# EAGLE board hbs_pcb (EAGLE 9.3.2)
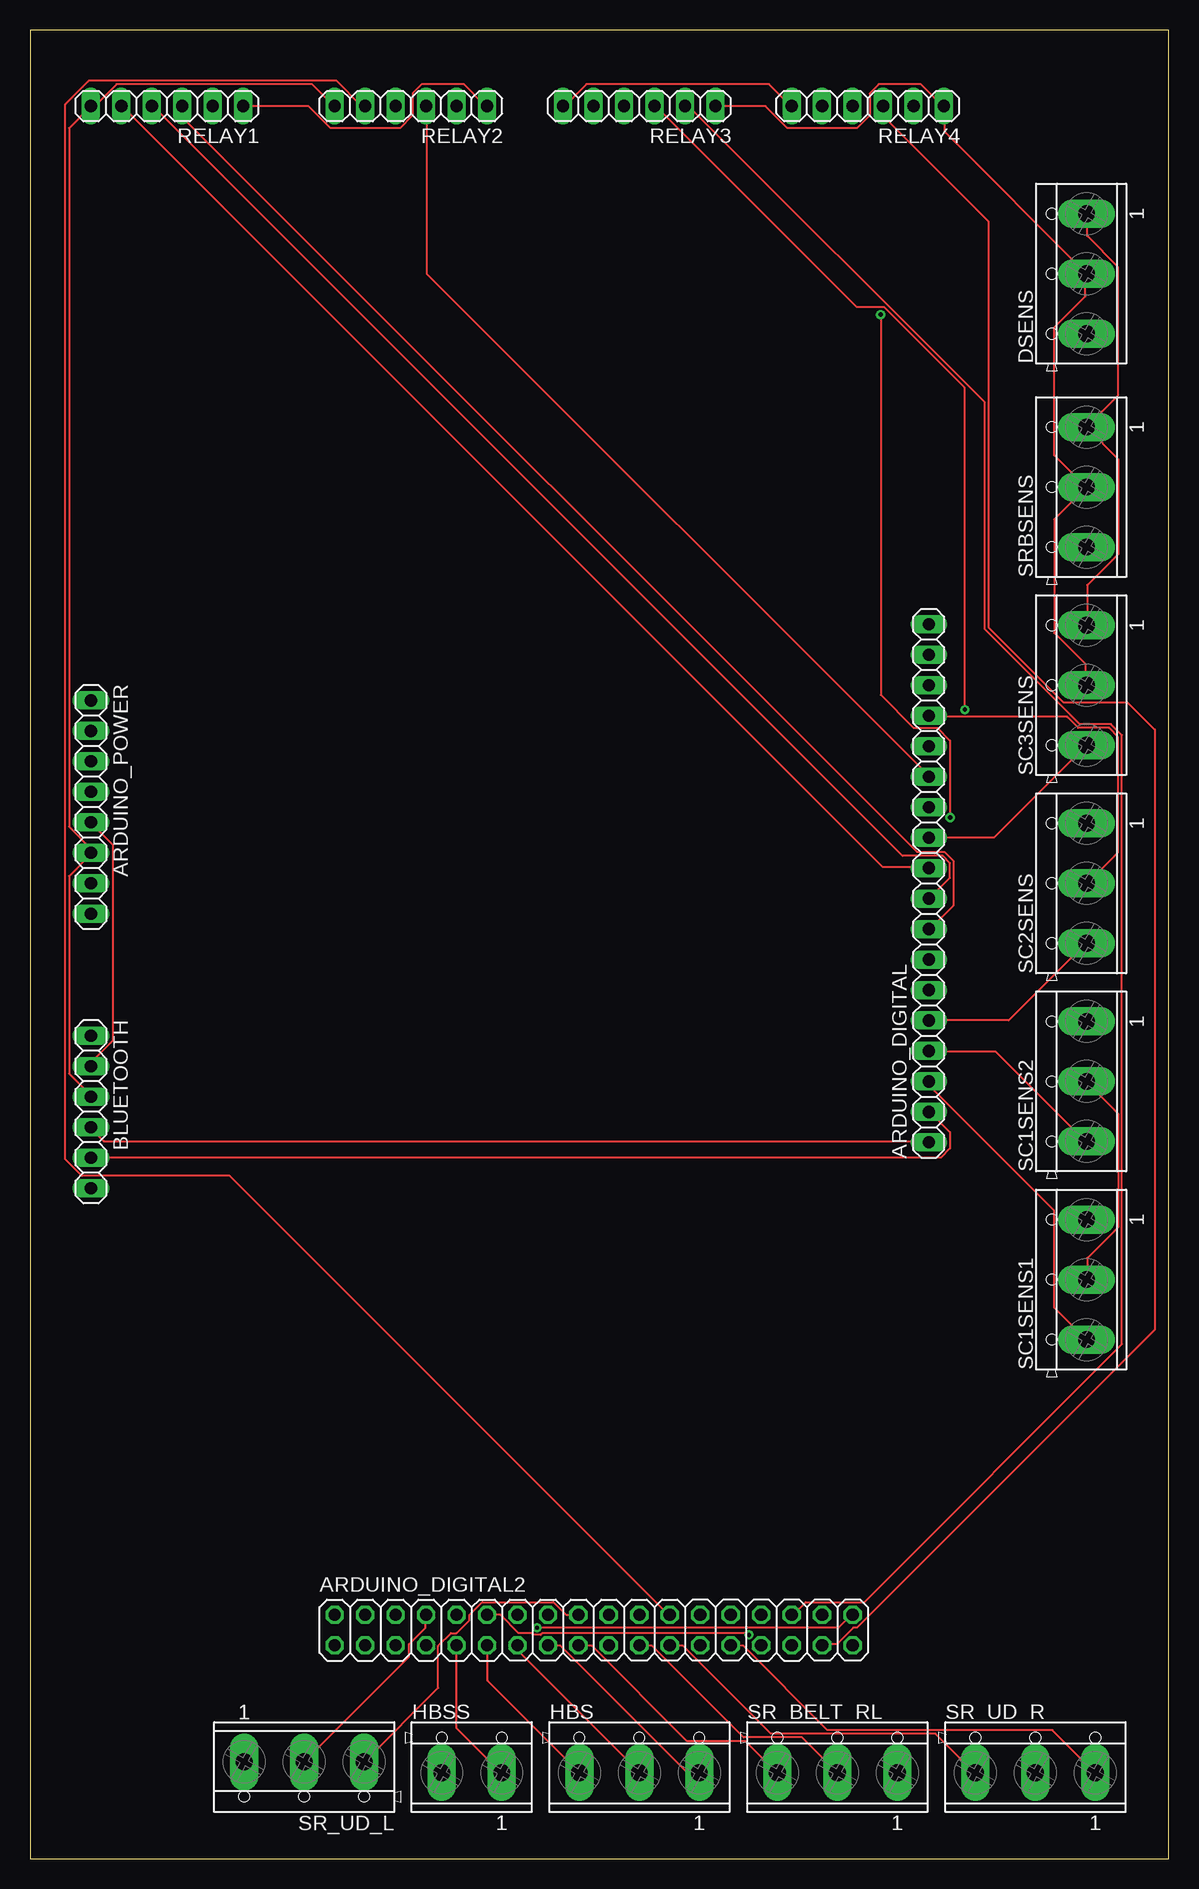
[diagram p0: board, top side]
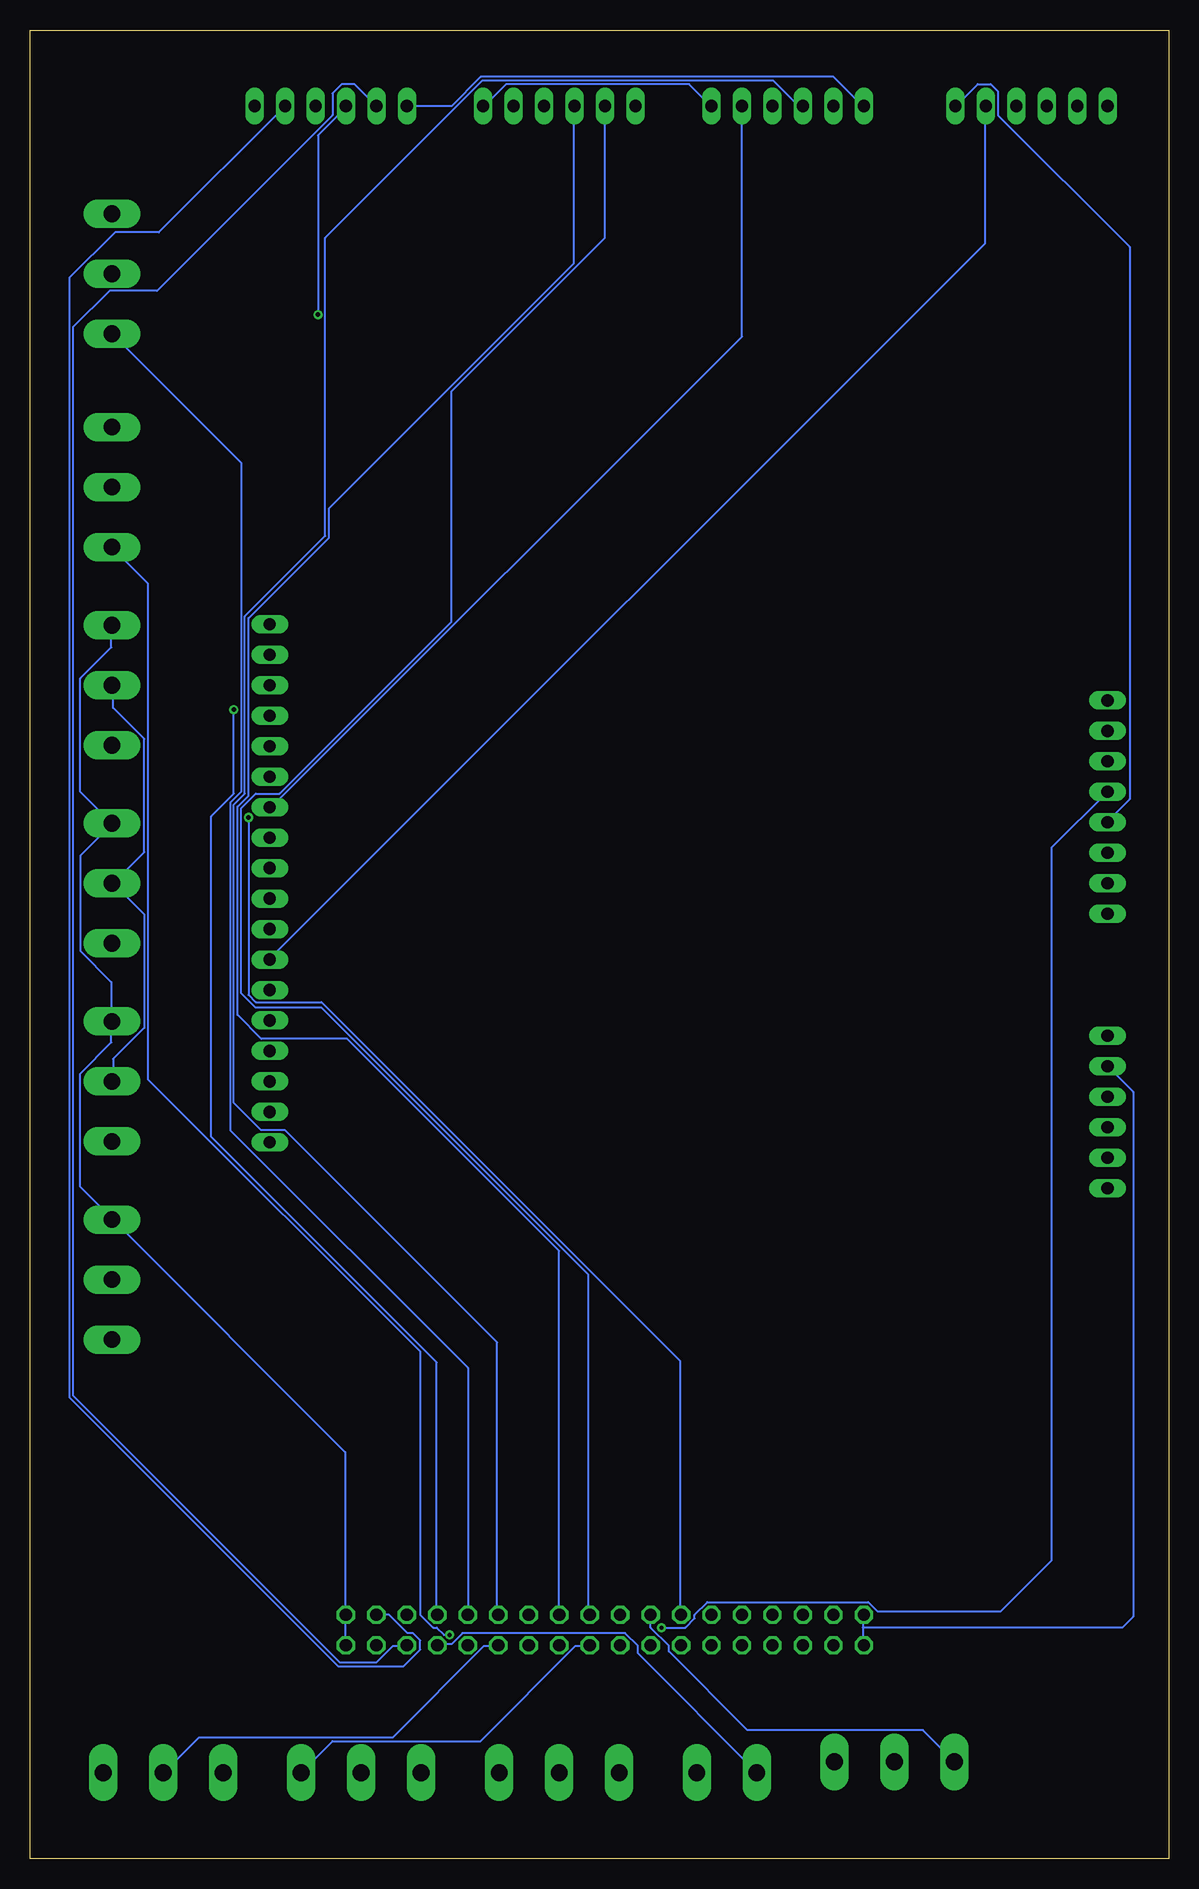
[diagram p1: board, bottom side, seen from below]

Size 94.92 x 152.39 mm. Coordinates in mm from the lower left corner, seen from the top.
Outline: 0,0 94.92,0 94.92,152.39 0,152.39 0,0
Copper layers (1*16): Top 0.035mm / dielectric 1.5mm / Bottom 0.035mm
Design rules "default": minimum track width 6mil, minimum drill 0.35mm, track to track 6mil, track to pad 6mil, pad to pad 6mil, via to via 6mil, smd to smd 6mil, copper to edge 40mil, drill to drill 6mil, minimum pad ring 10mil, minimum via ring 8mil, stop-mask expansion 4mil, vias tented up to drill 0mil, thermal gap 10mil

## Footprints (pad centres in the part's own frame; a part is rotated, then mirrored left to right if it is on the bottom)
1X18 = drill 1.016 long: 1 -21.59,0; 2 -19.05,0; 3 -16.51,0; 4 -13.97,0; 5 -11.43,0; 6 -8.89,0; 7 -6.35,0; 8 -3.81,0; 9 -1.27,0; 10 1.27,0; 11 3.81,0; 12 6.35,0; 13 8.89,0; 14 11.43,0; 15 13.97,0; 16 16.51,0; 17 19.05,0; 18 21.59,0
2X18 = drill 1.016 octagon: 1 -21.59,-1.27; 2 -21.59,1.27; 3 -19.05,-1.27; 4 -19.05,1.27; 5 -16.51,-1.27; 6 -16.51,1.27; 7 -13.97,-1.27; 8 -13.97,1.27; 9 -11.43,-1.27; 10 -11.43,1.27; 11 -8.89,-1.27; 12 -8.89,1.27; 13 -6.35,-1.27; 14 -6.35,1.27; 15 -3.81,-1.27; 16 -3.81,1.27; 17 -1.27,-1.27; 18 -1.27,1.27; 19 1.27,-1.27; 20 1.27,1.27; 21 3.81,-1.27; 22 3.81,1.27; 23 6.35,-1.27; 24 6.35,1.27; 25 8.89,-1.27; 26 8.89,1.27; 27 11.43,-1.27; 28 11.43,1.27; 29 13.97,-1.27; 30 13.97,1.27; 31 16.51,-1.27; 32 16.51,1.27; 33 19.05,-1.27; 34 19.05,1.27; 35 21.59,-1.27; 36 21.59,1.27
1X08 = drill 1.016 long: 1 -8.89,0; 2 -6.35,0; 3 -3.81,0; 4 -1.27,0; 5 1.27,0; 6 3.81,0; 7 6.35,0; 8 8.89,0
1X06 = drill 1.016 long: 1 -6.35,0; 2 -3.81,0; 3 -1.27,0; 4 1.27,0; 5 3.81,0; 6 6.35,0
TERMINAL_BLOCK_3P_5 = drill 1.4 pad 2.38 long: 1 5,-0.45; 2 0,-0.45; 3 -5,-0.45
TERMINAL_BLOCK_2P_5 = drill 1.4 pad 2.38 long: 1 2.5,-0.45; 2 -2.5,-0.45

## Placement (x,y rotation side)
ARDUINO_DIGITAL  [1X18]  74.93,81.28 90 top
ARDUINO_DIGITAL2  [2X18]  46.99,19.05 0 top
ARDUINO_POWER  [1X08]  5.08,87.63 270 top
BLUETOOTH  [1X06]  5.08,62.23 270 top
DSENS  CON_TERMINAL_BLOCK_03-5MM  [TERMINAL_BLOCK_3P_5]  87.63,132.08 90 top
HBS  CON_TERMINAL_BLOCK_03-5MM  [TERMINAL_BLOCK_3P_5]  50.8,7.62 0 top
HBSS  CON_TERMINAL_BLOCK_02-5MM  [TERMINAL_BLOCK_2P_5]  36.83,7.62 0 top
RELAY1  [1X06]  11.43,146.05 180 top
RELAY2  [1X06]  31.75,146.05 180 top
RELAY3  [1X06]  50.8,146.05 180 top
RELAY4  [1X06]  69.85,146.05 180 top
SC1SENS1  CON_TERMINAL_BLOCK_03-5MM  [TERMINAL_BLOCK_3P_5]  87.63,48.26 90 top
SC1SENS2  CON_TERMINAL_BLOCK_03-5MM  [TERMINAL_BLOCK_3P_5]  87.63,64.77 90 top
SC2SENS  CON_TERMINAL_BLOCK_03-5MM  [TERMINAL_BLOCK_3P_5]  87.63,81.28 90 top
SC3SENS  CON_TERMINAL_BLOCK_03-5MM  [TERMINAL_BLOCK_3P_5]  87.63,97.79 90 top
SR_BELT_RL  CON_TERMINAL_BLOCK_03-5MM  [TERMINAL_BLOCK_3P_5]  67.31,7.62 0 top
SR_UD_L  CON_TERMINAL_BLOCK_03-5MM  [TERMINAL_BLOCK_3P_5]  22.86,7.62 180 top
SR_UD_R  CON_TERMINAL_BLOCK_03-5MM  [TERMINAL_BLOCK_3P_5]  83.82,7.62 0 top
SRBSENS  CON_TERMINAL_BLOCK_03-5MM  [TERMINAL_BLOCK_3P_5]  87.63,114.3 90 top

## Library data of the parts
ARDUINO_DIGITAL ARDUINO_DIGITAL2 ARDUINO_POWER BLUETOOTH RELAY1-RELAY4 = pinhead
DSENS HBS HBSS SC1SENS1 SC1SENS2 SC2SENS SC3SENS SR_BELT_RL SR_UD_L SR_UD_R SRBSENS = dp_devices.v6

## Nets
N$1: ARDUINO_DIGITAL.1 BLUETOOTH.4
N$2: ARDUINO_DIGITAL.2 BLUETOOTH.5
N$3: ARDUINO_DIGITAL.3 SC1SENS1.3
N$4: ARDUINO_DIGITAL.4 SC1SENS2.3
N$5: ARDUINO_DIGITAL.5 SC2SENS.3
N$6: ARDUINO_DIGITAL.11 SC3SENS.3
N$7: ARDUINO_DIGITAL.7 RELAY1.2
N$8: ARDUINO_DIGITAL.8 RELAY1.3
N$9: ARDUINO_DIGITAL.9 RELAY1.4
N$10: ARDUINO_DIGITAL.10 RELAY1.5
N$11: ARDUINO_DIGITAL.12 RELAY2.2
N$12: ARDUINO_DIGITAL.13 RELAY2.3
N$14: ARDUINO_DIGITAL2.26 RELAY2.4
N$16: ARDUINO_DIGITAL2.24 RELAY2.5
N$17: ARDUINO_DIGITAL2.32 RELAY3.2
N$18: ARDUINO_DIGITAL2.30 RELAY3.3
N$19: ARDUINO_DIGITAL2.28 DSENS.3
N$20: ARDUINO_DIGITAL2.22 RELAY3.4
N$21: ARDUINO_DIGITAL2.20 RELAY3.5
N$22: ARDUINO_DIGITAL2.34 RELAY4.2
N$23: ARDUINO_DIGITAL2.33 RELAY4.3
N$24: ARDUINO_DIGITAL2.14 RELAY4.4
N$25: ARDUINO_DIGITAL2.31 RELAY4.5
N$27: ARDUINO_POWER.6 BLUETOOTH.3 RELAY1.6 RELAY2.6 RELAY3.6 RELAY4.6
N$28: ARDUINO_DIGITAL2.12 SRBSENS.3
N$29: ARDUINO_DIGITAL2.27 SR_UD_R.1
N$30: ARDUINO_DIGITAL2.25 SR_UD_R.2
N$31: ARDUINO_DIGITAL2.23 SR_UD_R.3
N$32: ARDUINO_DIGITAL2.21 SR_BELT_RL.2
N$33: ARDUINO_DIGITAL2.19 SR_BELT_RL.1
N$34: ARDUINO_DIGITAL2.17 SR_BELT_RL.3
N$35: ARDUINO_DIGITAL2.15 HBS.1
N$36: ARDUINO_DIGITAL2.13 HBS.2
N$37: ARDUINO_DIGITAL2.11 HBS.3
N$38: ARDUINO_DIGITAL2.9 HBSS.1
N$39: ARDUINO_DIGITAL2.29 HBSS.2
N$40: ARDUINO_DIGITAL2.8 SR_UD_L.2
N$41: ARDUINO_DIGITAL2.18 SR_UD_L.3
N$42: ARDUINO_DIGITAL2.16 SR_UD_L.1
N$43: ARDUINO_DIGITAL2.35 ARDUINO_DIGITAL2.36 ARDUINO_POWER.4 DSENS.1 SC1SENS1.1 SC1SENS2.1 SC2SENS.1 SC3SENS.1 SRBSENS.1
N$50: ARDUINO_DIGITAL2.1 ARDUINO_DIGITAL2.2 ARDUINO_DIGITAL.15 ARDUINO_POWER.5 BLUETOOTH.2 DSENS.2 RELAY1.1 RELAY2.1 RELAY3.1 RELAY4.1 SC1SENS1.2 SC1SENS2.2 SC2SENS.2 SC3SENS.2 SRBSENS.2

## Tracks (layer width: path | path; a pad name or v marks a point on that pad's centre or on a via)
N$1
  Top 0.152: ARDUINO_DIGITAL.1 74.88,59.79 6.15,59.79 5.08,60.86 BLUETOOTH.4
N$2
  Top 0.152: BLUETOOTH.5 75.95,58.42 76.71,59.18 76.71,60.55 75.03,62.23 ARDUINO_DIGITAL.2
N$3
  Top 0.152: ARDUINO_DIGITAL.3 75.03,64.67 75.03,64.36 85.39,54 85.39,45.92 87.99,43.33 SC1SENS1.3
N$4
  Top 0.152: ARDUINO_DIGITAL.4 75.03,67.26 80.52,67.26 87.99,59.79 SC1SENS2.3
N$5
  Top 0.152: ARDUINO_DIGITAL.5 81.58,69.85 87.99,76.25 SC2SENS.3
N$6
  Top 0.152: ARDUINO_DIGITAL.11 80.37,85.09 87.99,92.71 SC3SENS.3
N$7
  Bottom 0.152: RELAY1.2 15.29,146.05 15.29,134.62 74.88,75.03 ARDUINO_DIGITAL.7
N$8
  Top 0.152: RELAY1.3 12.7,145.14 73.97,83.87 76.25,83.87 77.01,83.11 77.01,79.45 75.03,77.47 ARDUINO_DIGITAL.8
N$9
  Top 0.152: RELAY1.4 10.26,146.05 72.75,83.57 76.1,83.57 76.71,82.96 76.71,81.74 75.03,80.06 ARDUINO_DIGITAL.9
N$10
  Top 0.152: ARDUINO_DIGITAL.10 74.88,82.65 71.07,82.65 7.67,146.05 RELAY1.5
N$11
  Bottom 0.152: RELAY2.2 35.56,126.85 74.88,87.53 ARDUINO_DIGITAL.12
N$12
  Top 0.152: RELAY2.3 33.12,146.05 33.12,132.03 74.88,90.27 ARDUINO_DIGITAL.13
N$14
  Bottom 0.152: RELAY2.4 30.84,146.05 32.97,148.18 57.2,148.18 70.31,135.08 70.31,110.24 77.01,103.53 77.01,88.75 77.93,87.83 77.93,62.99 75.64,60.71 73.66,60.71 55.98,43.03 55.98,20.32 ARDUINO_DIGITAL2.26
N$16
  Top 0.152: RELAY2.5 27.64,146.05 25.5,148.18 4.93,148.18 2.95,146.2 2.95,58.27 4.32,56.9 16.66,56.9 53.24,20.32 ARDUINO_DIGITAL2.24
N$17
  Top 0.152: RELAY3.2 54.91,146.05 79.6,121.36 79.6,102.46 87.53,94.54 90.12,94.54 91.03,93.62 91.03,42.88 69.55,21.39 64.67,21.39 63.6,20.32 ARDUINO_DIGITAL2.32
N$18  (via drill 0.35)
  Top 0.152: v77.93,95.76 77.93,122.58 71.22,129.29 68.94,129.29 52.17,146.05 RELAY3.3
  Bottom 0.152: v77.93,95.76 77.93,88.75 79.81,86.87 79.81,60.15 61.01,41.35 61.01,20.32 ARDUINO_DIGITAL2.30
N$19
  Bottom 0.152: ARDUINO_DIGITAL2.28 58.42,40.89 78.23,60.71 78.23,87.99 77.32,88.9 77.32,116.33 87.99,127 DSENS.3
N$20
  Bottom 0.152: ARDUINO_DIGITAL2.22 50.8,50.65 68.48,68.33 75.64,68.33 77.62,70.31 77.62,87.68 76.71,88.59 76.71,103.38 70,110.08 70,112.52 49.58,132.94 49.58,146.05 RELAY3.4
N$21
  Bottom 0.152: RELAY3.5 46.99,135.08 59.79,122.28 59.79,103.07 74.12,88.75 76.1,88.75 77.32,87.53 77.32,72.14 76.1,70.92 70.61,70.92 48.36,48.67 48.36,20.32 ARDUINO_DIGITAL2.20
N$22
  Bottom 0.152: ARDUINO_DIGITAL2.34 64.97,20.32 63.45,18.8 62.99,18.8 62.38,18.19 62.38,17.42 63.75,16.05 69.24,16.05 91.64,38.46 91.64,131.72 87.83,135.53 84.18,135.53 RELAY4.2
N$23
  Top 0.152: ARDUINO_DIGITAL2.33 66.04,17.88 67.26,17.88 68.63,19.25 68.94,19.25 93.78,44.09 93.78,94.08 91.49,96.37 86.16,96.37 79.91,102.62 79.91,136.45 71.22,145.14 71.22,146.05 RELAY4.3
N$24  (via drill 0.35)
  Top 0.152: v76.71,86.77 76.71,93.17 75.64,94.23 73.66,94.23 70.92,96.98 v70.92,128.68
  Bottom 0.152: v76.71,86.77 76.71,71.98 76.1,71.37 70.61,71.37 40.74,41.5 40.74,20.32 ARDUINO_DIGITAL2.14 | v70.92,128.68 70.92,143.61 68.48,146.05 RELAY4.4
N$25
  Bottom 0.152: RELAY4.5 67.87,147.88 68.94,147.88 69.7,147.12 69.7,145.29 84.33,130.66 88.29,130.66 91.34,127.61 91.34,38.61 69.09,16.36 66.04,16.36 64.67,17.73 63.6,17.73 ARDUINO_DIGITAL2.31
N$27
  Top 0.152: BLUETOOTH.3 5.08,63.6 3.25,65.43 3.25,81.89 5.08,83.72 ARDUINO_POWER.6 5.08,84.18 3.25,86 3.25,144.22 RELAY1.6 5.39,146.05 7.21,147.88 23.52,147.88 25.35,146.05 RELAY2.6 | RELAY3.6 44.55,146.05 46.38,147.88 61.62,147.88 63.45,146.05 RELAY4.6
  Bottom 0.152: RELAY4.6 59.79,146.05 57.35,148.49 27.94,148.49 25.5,146.05 RELAY2.6
N$28  (via drill 0.35)
  Top 0.152: ARDUINO_DIGITAL2.12 39.22,20.32 40.74,18.8 41.81,18.8 41.96,18.64 42.57,18.64 42.72,18.8 59.79,18.8 v59.94,18.64
  Bottom 0.152: v59.94,18.64 60.4,18.64 61.01,19.25 61.32,19.25 62.38,20.32 62.38,42.27 85.09,64.97 85.09,106.27 87.99,109.17 SRBSENS.3
N$29
  Top 0.152: ARDUINO_DIGITAL2.27 58.42,17.73 59.49,17.73 66.5,10.72 85.24,10.72 88.75,7.21 SR_UD_R.1
N$30
  Bottom 0.152: ARDUINO_DIGITAL2.25 55.98,17.73 57.05,17.73 64.67,10.11 80.82,10.11 83.72,7.21 SR_UD_R.2
N$31
  Top 0.152: ARDUINO_DIGITAL2.23 53.39,17.73 54.46,17.73 61.77,10.41 75.49,10.41 78.69,7.21 SR_UD_R.3
N$32
  Top 0.152: ARDUINO_DIGITAL2.21 50.8,17.73 51.87,17.73 59.49,10.11 64.36,10.11 67.26,7.21 SR_BELT_RL.2
N$33
  Bottom 0.152: ARDUINO_DIGITAL2.19 48.36,17.73 49.43,17.73 57.35,9.8 69.7,9.8 72.29,7.21 SR_BELT_RL.1
N$34
  Top 0.152: ARDUINO_DIGITAL2.17 45.77,17.73 46.84,17.73 54.76,9.8 59.64,9.8 62.23,7.21 SR_BELT_RL.3
N$35
  Top 0.152: ARDUINO_DIGITAL2.15 43.18,17.73 44.25,17.73 54.76,7.21 55.68,7.21 HBS.1
N$36
  Top 0.152: ARDUINO_DIGITAL2.13 40.74,17.73 40.74,17.27 50.8,7.21 HBS.2
N$37
  Top 0.152: ARDUINO_DIGITAL2.11 38.15,17.73 38.15,14.83 45.77,7.21 HBS.3
N$38
  Top 0.152: ARDUINO_DIGITAL2.9 35.56,10.87 39.22,7.21 HBSS.1
N$39
  Bottom 0.152: ARDUINO_DIGITAL2.29 60.86,17.88 59.79,17.88 58.88,18.8 45.31,18.8 44.25,17.73 44.25,17.12 34.34,7.21 HBSS.2
N$40
  Top 0.152: ARDUINO_DIGITAL2.8 32.97,20.32 32.97,19.25 31.6,17.88 31.6,16.82 22.91,8.13 SR_UD_L.2
N$41
  Top 0.152: ARDUINO_DIGITAL2.18 44.7,20.32 43.64,21.39 37.69,21.39 36.63,20.32 36.63,19.86 35.56,18.8 35.1,18.8 34.04,17.73 34.04,14.22 27.94,8.13 SR_UD_L.3
N$42
  Bottom 0.152: ARDUINO_DIGITAL2.16 43.18,19.25 41.66,17.73 41.66,17.27 35.1,10.72 20.47,10.72 17.88,8.13 SR_UD_L.1
N$43  (via drill 0.35)
  Top 0.152: SC3SENS.1 88.14,102.92 88.14,106.12 90.73,108.71 90.73,116.64 88.14,119.23 SRBSENS.1 88.14,119.38 90.73,121.97 90.73,132.64 88.14,135.23 88.14,137.06 DSENS.1 | v42.27,19.25 67.41,19.25 68.48,20.32 ARDUINO_DIGITAL2.36
  Bottom 0.152: ARDUINO_POWER.4 9.75,84.23 9.75,24.84 13.97,20.62 24.28,20.62 25.04,21.39 38.46,21.39 39.52,20.32 39.52,20.02 40.28,19.25 v42.27,19.25 | 68.63,20.32 68.63,17.88 ARDUINO_DIGITAL2.35 | 68.63,20.32 68.63,33.88 87.99,53.24 SC1SENS1.1 88.14,53.39 90.73,55.98 90.73,65.43 88.14,68.02 88.14,69.7 SC1SENS2.1 88.14,69.85 88.14,73.05 90.73,75.64 90.73,83.57 88.14,86.16 SC2SENS.1 88.14,86.31 90.73,88.9 90.73,98.35 88.14,100.94 88.14,102.77 SC3SENS.1 | 68.63,20.32 ARDUINO_DIGITAL2.36
N$50
  Top 0.152: BLUETOOTH.2 5.08,66.34 6.91,68.17 6.91,84.48 5.08,86.31 ARDUINO_POWER.5 | RELAY1.1 23.22,146.05 25.04,144.22 30.84,144.22 31.9,145.29 31.9,147.12 32.66,147.88 36.17,147.88 38,146.05 RELAY2.1 | SC3SENS.2 87.99,97.89 87.99,99.57 85.39,102.16 85.39,111.61 87.99,114.2 SRBSENS.2 87.99,114.35 85.39,116.94 85.39,127.61 87.99,130.2 87.99,132.03 DSENS.2 87.99,132.18 76.25,143.92 76.25,146.05 RELAY4.1 76.1,146.05 74.27,147.88 70.76,147.88 70,147.12 70,145.29 68.94,144.22 63.14,144.22 61.32,146.05 RELAY3.1 | SC1SENS1.2 88.14,48.36 88.14,50.04 90.73,52.63 90.73,62.08 88.14,64.67 SC1SENS2.2 | ARDUINO_DIGITAL.15 75.03,95.15 86.46,95.15 87.38,94.23 89.97,94.23 90.73,93.47 90.73,83.87 88.14,81.28 SC2SENS.2
  Bottom 0.152: 25.5,19.25 25.5,20.32 ARDUINO_DIGITAL2.2 | 25.5,19.25 25.5,17.88 ARDUINO_DIGITAL2.1 | 25.5,19.25 3.86,19.25 2.95,20.17 2.95,63.91 BLUETOOTH.2 | RELAY3.1 57.05,146.05 55.22,147.88 39.98,147.88 38.15,146.05 RELAY2.1 | 87.99,81.28 85.39,78.69 85.39,69.24 87.99,66.65 87.99,64.82 SC1SENS2.2 | 87.99,81.28 85.39,83.87 85.39,93.32 87.99,95.91 87.99,97.74 SC3SENS.2 | 87.99,81.28 SC2SENS.2 | ARDUINO_POWER.5 5.08,86.46 3.25,88.29 3.25,134.31 14.22,145.29 14.22,147.27 14.83,147.88 15.9,147.88 17.73,146.05 RELAY1.1